# EAGLE board zegarek_v1.2 (EAGLE 6.2)
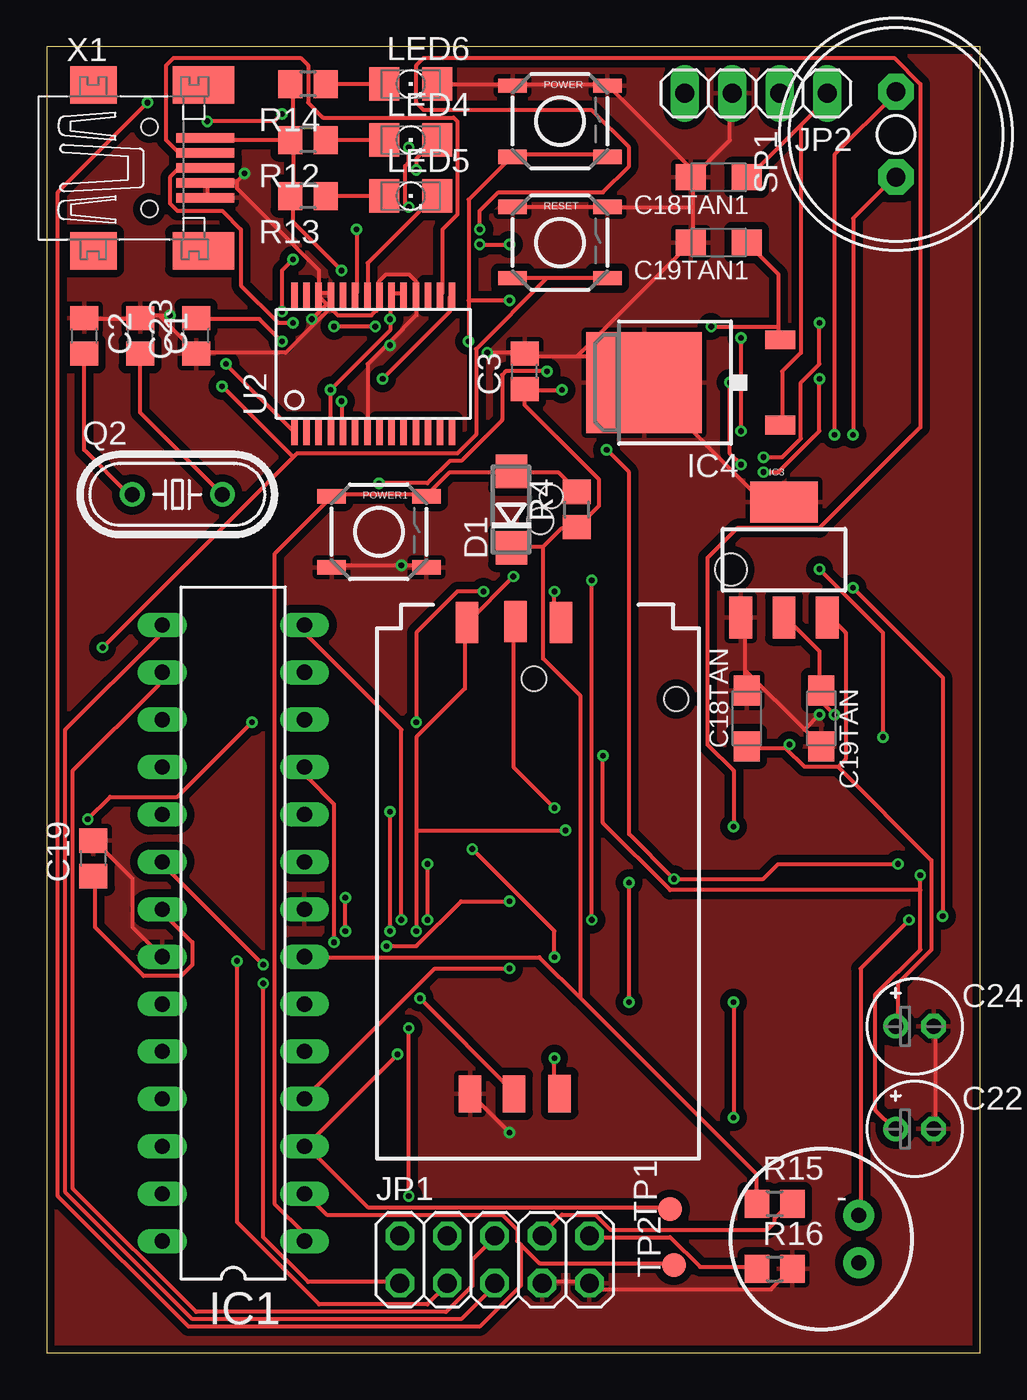
[diagram p0: board, top side]
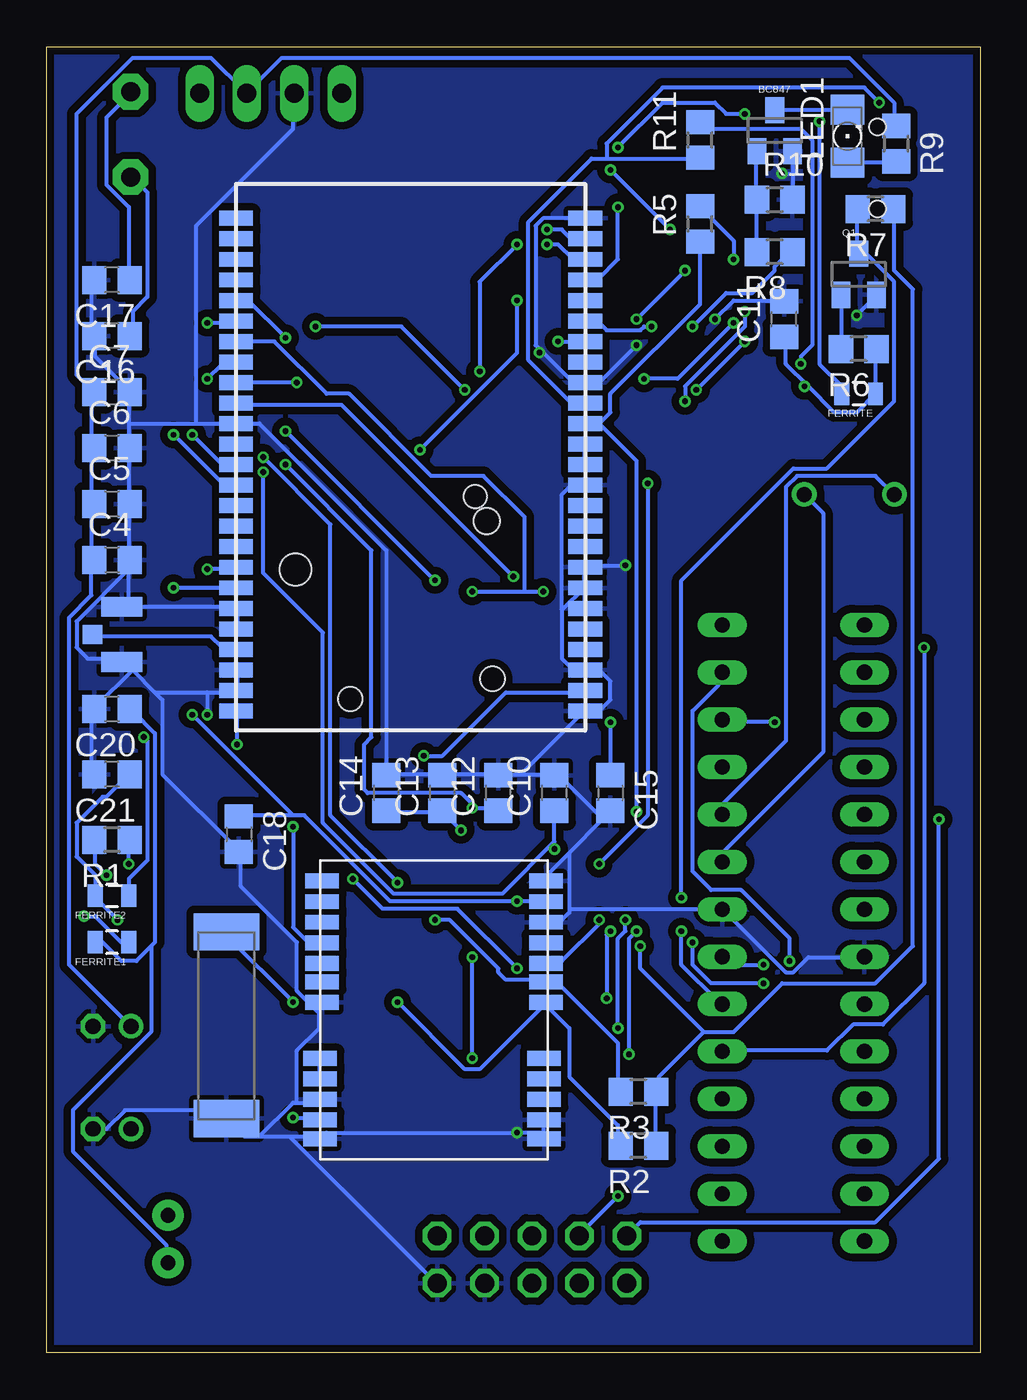
[diagram p1: board, bottom side, seen from below]

Size 50 x 70 mm. Coordinates in mm from the lower left corner, seen from the top.
Outline: 0,0 50,0 50,70 0,70 0,0
Copper layers (1*16): Top 0.035mm / dielectric 1.5mm / Bottom 0.035mm
Design rules: minimum track width 6mil, minimum drill 12mil, track to track 6mil, track to pad 6mil, pad to pad 6mil, via to via 6mil, smd to smd 0mil, copper to edge 10mil, drill to drill 10mil, minimum pad ring 10mil, minimum via ring 6mil, stop-mask expansion 2mil, vias tented up to drill 100mil, thermal gap 10mil
Net classes: 0 default: width 0.203 mm

## Footprints (pad centres in the part's own frame; a part is rotated, then mirrored left to right if it is on the bottom)
SOT23 = smd 1 x 1.4: 1 -0.95,-1.1; 2 0.95,-1.1; 3 0,1.1
C0805 = smd 1.3 x 1.5: 1 -0.95,0; 2 0.95,0
SMC_A = smd 1.6 x 1.4: + -1.5,0; - 1.5,0
E2-5 = drill 0.813 pad 1.27: + -1.016,0 | drill 0.813 pad 1.27 octagon: - 1.016,0
DO214AC = smd 1.8 x 1.7: A 2.05,0; C -2.05,0
0805 = smd 0.8 x 1.2: 1 -0.9,0; 2 0.9,0
LEON-G100/G200 = smd 1.8 x 0.8: 1 -9.35,13.6; 2 -9.35,12.5; 3 -9.35,11.4; 4 -9.35,10.3; 5 -9.35,9.2; 6 -9.35,8.1; 7 -9.35,7; 8 -9.35,5.9; 9 -9.35,4.8; 10 -9.35,3.7; 11 -9.35,2.6; 12 -9.35,1.5; 13 -9.35,0.4; 14 -9.35,-0.7; 15 -9.35,-1.8; 16 -9.35,-2.9; 17 -9.35,-4; 18 -9.35,-5.1; 19 -9.35,-6.2; 20 -9.35,-7.3; 21 -9.35,-8.4; 22 -9.35,-9.5; 23 -9.35,-10.6; 24 -9.35,-11.7; 25 -9.35,-12.8; 26 9.35,-12.8; 27 9.35,-11.7; 28 9.35,-10.6; 29 9.35,-9.5; 30 9.35,-8.4; 31 9.35,-7.3; 32 9.35,-6.2; 33 9.35,-5.1; 34 9.35,-4; 35 9.35,-2.9; 36 9.35,-1.8; 37 9.35,-0.7; 38 9.35,0.4; 39 9.35,1.5; 40 9.35,2.6; 41 9.35,3.7; 42 9.35,4.8; 43 9.35,5.9; 44 9.35,7; 45 9.35,8.1; 46 9.35,9.2; 47 9.35,10.3; 48 9.35,11.4; 49 9.35,12.5; 50 9.35,13.6 | hole 1.31: -4.39,11.88 | hole 1.29: 3.23,12.96 | hole 1.7: 6.16,6.02 | hole 1.4: -4.07,3.42 | hole 1.24: -3.47,2.12
GPS1003 = smd 3.5 x 2: FEED 0.23,4.96; GND 0.23,-5.04
DIL28-3 = drill 0.813 long: 1 -16.51,-3.81; 2 -13.97,-3.81; 3 -11.43,-3.81; 4 -8.89,-3.81; 5 -6.35,-3.81; 6 -3.81,-3.81; 7 -1.27,-3.81; 8 1.27,-3.81; 9 3.81,-3.81; 10 6.35,-3.81; 11 8.89,-3.81; 12 11.43,-3.81; 13 13.97,-3.81; 14 16.51,-3.81; 15 16.51,3.81; 16 13.97,3.81; 17 11.43,3.81; 18 8.89,3.81; 19 6.35,3.81; 20 3.81,3.81; 21 1.27,3.81; 22 -1.27,3.81; 23 -3.81,3.81; 24 -6.35,3.81; 25 -8.89,3.81; 26 -11.43,3.81; 27 -13.97,3.81; 28 -16.51,3.81
SOT223 = smd 1.219 x 2.235: 1 -2.311,-3.099; 2 0,-3.099; 3 2.311,-3.099 | smd 3.6 x 2.2: 4 0,3.099
DPACK_3 = smd 1 x 1.6: 1 -2.28,-4.8; 3 2.28,-4.8 | smd 5.4 x 6.2: 4 0,2.5
2X05 = drill 1.016 octagon: 1 -5.08,-1.27; 2 -5.08,1.27; 3 -2.54,-1.27; 4 -2.54,1.27; 5 0,-1.27; 6 0,1.27; 7 2.54,-1.27; 8 2.54,1.27; 9 5.08,-1.27; 10 5.08,1.27
1X04 = drill 1.016 long: 1 -3.81,0; 2 -1.27,0; 3 1.27,0; 4 3.81,0
1206 = smd 1.6 x 1.803: A -1.422,0; C 1.422,0
TACTILE_SWITCH_SMD = smd 1.524 x 0.762: 1 -2.54,1.905; 2 2.54,1.905; 3 -2.54,-1.905; 4 2.54,-1.905
HC49/S = drill 0.813: 1 -2.413,0; 2 2.413,0
R0805 = smd 1.3 x 1.5: 1 -0.95,0; 2 0.95,0
AL11P = drill 1.016 pad 1.905 octagon: + 2.286,0; - -2.286,0
TP13R = smd 1.3 x 1.3: TP 0,0
SSOP28DB = smd 0.348 x 1.397: 1 -4.225,-3.656; 2 -3.575,-3.656; 3 -2.925,-3.656; 4 -2.275,-3.656; 5 -1.625,-3.656; 6 -0.975,-3.656; 7 -0.325,-3.656; 8 0.325,-3.656; 9 0.975,-3.656; 10 1.625,-3.656; 11 2.275,-3.656; 12 2.925,-3.656; 13 3.575,-3.656; 14 4.225,-3.656; 15 4.225,3.656; 16 3.575,3.656; 17 2.925,3.656; 18 2.275,3.656; 19 1.625,3.656; 20 0.975,3.656; 21 0.325,3.656; 22 -0.325,3.656; 23 -0.975,3.656; 24 -1.625,3.656; 25 -2.275,3.656; 26 -2.925,3.656; 27 -3.575,3.656; 28 -4.225,3.656
SIMHOLDER3 = smd 2.2 x 1.2: 1 0.95,4.81; 2 0.91,7.41; 3 0.95,9.86 | smd 2 x 1.2: 4 26.2,9.78; 5 26.22,7.34; 6 26.22,4.98
MIC-9.7MM = drill 0.8 pad 1.676: 1 -2,1.27; 2 -2,-1.27
RF-IPX1 = smd 1 x 1.05: FEED 0,-1.05 | smd 1.05 x 2.2: GND 1.475,0.525; GND1 -1.475,0.525
NEO-6M = smd 0.8 x 1.8: CFG_GPS0/SCK -3.32,-6.15; EXTINT0 3.98,5.75; GND -4.42,5.85; GND1 -6.52,5.85; GND2 -6.52,-6.15; GND3 7.28,-6.25; MISO/CFG_COM1 -4.42,-6.15; MOSI/CFG_COM0 -5.52,-6.15; RESERVED 7.28,5.75; RESERVED1 -2.22,5.85; RESERVED2 -2.22,-6.15; RF_IN -5.52,5.85; RXD1 3.98,-6.25; SCL2 1.88,-6.25; SDA2 0.78,-6.25; SS_N 6.18,5.75; TIMEPULSE 5.08,5.75; TXD1 2.88,-6.25; USB_DM 2.88,5.75; USB_DP 1.88,5.75; V_BCKP 5.08,-6.25; VCC 6.18,-6.25; VCC_REF -3.32,5.85; VDD_USB 0.78,5.75
32005-301 = smd 3.1 x 0.5: 1 3,1.6; 2 3,0.8; 3 3,0; 4 3,-0.8; 5 3,-1.6 | smd 2.5 x 2: M1 -3,-4.45; M2 -3,4.45 | smd 3.3 x 2: M3 2.9,4.45; M4 2.9,-4.45 | hole 0.9: 0,2.2; 0,-2.2

## Placement (x,y rotation side)
BC847  [SOT23]  11,65.5 0 bottom
C1  22pF  [C0805]  5,54.5 270 top
C2  22pF  [C0805]  2,54.5 270 top
C3  100nF  [C0805]  25.6,52.6 90 top
C4  39pF  [C0805]  46.5,42.5 0 bottom
C5  10pF  [C0805]  46.5,45.5 0 bottom
C6  10nF  [C0805]  46.5,48.5 0 bottom
C7  100nF  [C0805]  46.5,51.5 0 bottom
C10  47pF  [C0805]  22.8,30 90 bottom
C11  47pF  [C0805]  10.5,55.4 90 bottom
C12  47pF  [C0805]  25.8,30 90 bottom
C13  47pF  [C0805]  28.8,30 90 bottom
C14  100nF  [C0805]  31.8,30 90 bottom
C15  47pF  [C0805]  19.8,30 270 bottom
C16  27pF  [C0805]  46.5,54.5 180 bottom
C17  27pF  [C0805]  46.5,57.5 180 bottom
C18  100nF  [C0805]  39.7,27.8 270 bottom
C18TAN  10uF  [SMC_A]  37.5,34 90 top
C18TAN1  10uF  [SMC_A]  36,63 180 top
C19  100nF  [C0805]  2.5,26.5 90 top
C19TAN  10uF  [SMC_A]  41.5,34 270 top
C19TAN1  10uF  [SMC_A]  36,59.5 180 top
C20  27pF  [C0805]  46.5,34.5 180 bottom
C21  27pF  [C0805]  46.5,31 180 bottom
C22  [E2-5]  46.5,12 0 top
C23  100nF  [C0805]  8,54.5 90 top
C24  [E2-5]  46.5,17.5 0 top
D1  GS1B  [DO214AC]  24.9,45.2 90 top
FERRITE  [0805]  6.5,51.4 180 bottom
FERRITE1  82nH  [0805]  46.5,22 180 bottom
FERRITE2  82nH  [0805]  46.5,24.5 180 bottom
G1  LEON-G100/G200  [LEON-G100/G200]  30.5,48 180 bottom
GPS1003  GPS1003  [GPS1003]  40.6,17.6 0 bottom
IC1  MEGA8-P  [DIL28-3]  10,22.5 90 top
IC3  LM1117S-3.3  [SOT223]  39.5,42.5 0 top
IC4  NCV78M05BDTRKG  [DPACK_3]  34.5,52 90 top
JP1  [2X05]  24,5 0 top
JP2  [1X04]  38,67.5 180 top
LED1  [1206]  7.1,65.2 90 bottom
LED4  [1206]  19.5,65 0 top
LED5  [1206]  19.5,62 0 top
LED6  [1206]  19.5,68 0 top
POWER  [TACTILE_SWITCH_SMD]  27.5,66 0 top
POWER1  [TACTILE_SWITCH_SMD]  17.8,44 0 top
Q1  [SOT23]  6.5,57.8 0 bottom
Q2  [HC49/S]  7,46 0 top
R1  100k  [R0805]  46.5,27.5 180 bottom
R2  4.7k  [R0805]  18.3,11.1 180 bottom
R3  4.7k  [R0805]  18.3,14 180 bottom
R4  22k  [R0805]  28.4,45.2 90 top
R5  1k  [R0805]  15,60.5 90 bottom
R6  330k  [R0805]  6.5,53.8 180 bottom
R7  22k  [R0805]  5.6,61.3 180 bottom
R8  10k  [R0805]  11,59 180 bottom
R9  820  [R0805]  4.5,64.8 270 bottom
R10  47k  [R0805]  11,61.8 0 bottom
R11  1k  [R0805]  15,65 90 bottom
R12  330  [R0805]  14,65 180 top
R13  330  [R0805]  14,62 180 top
R14  330  [R0805]  14,68 180 top
R15  1k5  [R0805]  39,8 0 top
R16  2k  [R0805]  39,4.5 0 top
RESET  [TACTILE_SWITCH_SMD]  27.5,59.5 0 top
SP1  AL11P  [AL11P]  45.5,65.3 90 top
TP1  TPTP13R  [TP13R]  33.4,7.7 90 top
TP2  TPTP13R  [TP13R]  33.6,4.7 90 top
U2  [SSOP28DB]  17.5,53 0 top
U$5  SIMHOLDER3  [SIMHOLDER3]  17.7,40.1 270 top
U$6  MIC9.7MM  [MIC-9.7MM]  41.5,6.1 180 top
U$7  RFIPX1  [RF-IPX1]  46.5,38.5 270 bottom
U$9  NEO-6M  [NEO-6M]  29.5,18 90 bottom
X1  MINI-USB-32005-301  [32005-301]  5.5,63.5 0 top

## Library data of the parts
BC847 FERRITE FERRITE1 FERRITE2 IC3 POWER POWER1 Q1 RESET U$5 U$6 = SparkFun
C1-C7 C10-C18 C18TAN C18TAN1 C19 C19TAN C19TAN1 C20-C24 R1-R16 = rcl
D1 = diode
G1 = u-blox-1; OC_FARNELL: unknown; OC_NEWARK: unknown
GPS1003 U$9 = u-blox_NEO-6M
IC1 = atmel; OC_FARNELL: unknown; OC_NEWARK: unknown
IC4 = linear
JP1 JP2 = pinhead
LED1 LED4-LED6 = led
Q2 = crystal; OC_FARNELL: 1667008; OC_NEWARK: unknown
SP1 = buzzer; OC_FARNELL: unknown; OC_NEWARK: unknown
TP1 TP2 = testpad
U2 = ftdichip-5
U$7 = RFIPX
X1 = con-cypressindustries; OC_FARNELL: unknown; OC_NEWARK: unknown

## Nets
+3V0: C18.1 C19TAN.+ IC3.2 R2.1 R3.1 R7.1 U$9.VCC
+5V0: C3.1 C19TAN1.+ D1.C IC1.7 IC1.20 IC4.3 R4.1 R15.1
EXTINT0: G1.24 U$9.EXTINT0
GND: BC847.2 C1.1 C2.1 C3.2 C4.2 C5.2 C6.2 C7.2 C10.2 C11.2 C12.2 C13.2 C14.2 C15.2 C16.2 C17.2 C18.2 C18TAN1.- C18TAN.- C19.2 C19TAN1.- C19TAN.- C20.2 C21.2 C22.- C23.1 C24.- G1.1 G1.3 G1.6 G1.7 G1.8 G1.12 G1.17 G1.25 G1.36 G1.45 G1.46 G1.48 G1.49 GPS1003.GND IC1.8 IC1.22 IC3.1 IC3.4 IC4.4 JP1.7 JP1.9 JP2.3 LED6.C POWER1.3 POWER1.4 POWER.1 POWER.2 Q1.2 R10.2 R16.2 RESET.1 RESET.2 U2.7 U2.18 U2.21 U2.25 U2.26 U$5.6 U$7.GND U$7.GND1 U$9.GND U$9.GND1 U$9.GND2 U$9.GND3 U$9.MOSI/CFG_COM0 U$9.V_BCKP U$9.VDD_USB X1.4 X1.5
LCD1: IC1.11 JP1.1
LCD2: IC1.12 JP1.2
LCD3: IC1.13 JP1.3
LCD4: IC1.14 JP1.4
LCD5: IC1.15 JP1.5
LCD6: IC1.16 JP1.6
LEON_POWER: G1.19 IC1.4 POWER.3 POWER.4 R1.1
LEON_RESET: C11.1 FERRITE.1 IC1.5 R6.1 RESET.3 RESET.4
LEON_RESET?: IC1.6 Q1.3 R7.2
LEON_RXD: G1.16 IC1.2 R11.1 TP2.TP
LEON_TXD: G1.15 IC1.3 R5.1 TP1.TP
N$1: FERRITE.2 G1.22
N$2: C2.2 IC1.10 Q2.1
N$3: C22.+ G1.2 R1.2
N$4: C13.1 C14.1 G1.35 U$5.1 U$5.5
N$5: C15.1 G1.32 U$5.3
N$6: C12.1 G1.34 U$5.2
N$7: C16.1 G1.39 SP1.-
N$8: C10.1 G1.33 U$5.4
N$9: C17.1 G1.38 SP1.+
N$10: G1.13 G1.14
N$11: FERRITE1.1 G1.44
N$12: FERRITE2.1 G1.43
N$13: C20.1 FERRITE1.2 U$6.1
N$14: C21.1 FERRITE2.2 U$6.2
N$15: Q1.1 R6.2
N$16: BC847.1 R8.2 R10.1
N$17: LED1.A R9.2
N$18: BC847.3 LED1.C
N$19: G1.20 R8.1
N$20: G1.47 U$7.FEED
N$23: GPS1003.FEED U$9.RF_IN
N$24: G1.31 R2.2 U$9.SDA2
N$25: U$9.RESERVED1 U$9.VCC_REF
N$26: G1.30 R3.2 U$9.SCL2
N$27: G1.23 U$9.TXD1
N$28: C1.2 IC1.9 Q2.2
N$29: D1.A IC1.1 POWER1.1 POWER1.2 R4.2
N$30: C19.1 IC1.21
N$31: LED4.A R12.1
N$32: LED5.A R13.1
N$33: LED4.C U2.23
N$34: LED5.C U2.22
N$35: R11.2 U2.1
N$36: R5.2 U2.5
N$37: JP1.10 R16.1
N$38: JP1.8 R15.2
N$40: JP2.4
N$47: C23.2 R12.2 R13.2 R14.2 U2.4 U2.19 U2.20 X1.1
N$48: U2.16 X1.2
N$49: U2.15 X1.3
N$51: LED6.A R14.1
VBAT: C4.1 C5.1 C6.1 C7.1 C18TAN.+ C24.+ G1.50 IC3.3 JP2.2 R9.1
VIN: C18TAN1.+ IC4.1 JP2.1

## Tracks (layer width: path | path; a pad name or v marks a point on that pad's centre or on a via)
+3V0  (via drill 0.3)
  Top 0.203: IC3.2 39.6,39.4 41.4,37.6 41.4,35.6 C19TAN.+ 41.6,35.4 41.6,34.8 v42.2,34.2 | v24.8,24.2 22.2,24.2 19.8,21.8 v18.2,21.8
  Bottom 0.203: 36.8,28.8 36.2,28.8 31.6,24.2 v24.8,24.2 23.4,24.2 U$9.VCC | 36.8,28.8 39.6,28.8 C18.1 | 36.8,28.8 v42.2,34.2 | R2.1 17.4,11.2 17.4,14 R3.1 17.2,14 17.2,14.8 14.8,17.2 | 14.8,17.2 13.2,17.2 10.6,19.8 5.6,19.8 3.6,21.8 3.6,57 4.6,58 4.6,61.2 R7.1 | v18.2,21.8 18.2,20.6 14.8,17.2
+5V0  (via drill 0.3)
  Top 0.203: 39.2,55 39.2,57.8 C19TAN1.+ | 39.2,55 39.2,54.4 IC4.3 | 28.4,44.2 27.6,44.2 26.6,43.2 | 26.6,43.2 25,43.2 D1.C | 25.6,51.6 25.6,50.8 29.6,46.8 29.6,45.4 28.4,44.2 | 28.4,44.2 R4.1 | v35.6,55 39.2,55 | 25.6,51.6 v27.6,51.6 | 25.6,51.6 C3.1 | 28.6,19 26.4,21.2 14,21.2 IC1.7 | 28.6,19 38,9.6 38,8 R15.1 | v11.6,20.8 6.2,26.2 IC1.20 | 26.6,43.2 26.6,37.2 28.6,35.2 28.6,19
  Bottom 0.203: v35.6,55 31,55 v27.6,51.6 | v11.6,20.8 13.4,20.8 13.8,21.2 IC1.7
EXTINT0  (via drill 0.3)
  Top 0.203: v36.8,28.2 36.8,31.2 35.4,32.6 35.4,42.6 37,44.2 41.4,44.2 46.8,49.6 46.8,68 45.4,69.4 20.2,69.4 19.8,69 19.8,67 20.2,66.6 29.2,66.6 31.2,64.6 31.2,63.6 29.8,62.2 24.2,62.2 23.2,61.2 v23.2,60.2
  Bottom 0.203: v36.8,28.2 36.8,22.8 36,22 35.4,22 U$9.EXTINT0 | v23.2,60.2 22.4,60.2 22,59.8 21.2,59.8 G1.24
GND  (via drill 0.3)
  Top 0.203: 18.4,54.2 19.8,55.6 19.8,56.6 U2.18 19.8,56.8 19.8,57.4 19.4,57.8 18.2,57.8 17.8,57.4 17.8,56.8 U2.21 17.8,56.6 17.8,56 17.4,55.6 15.6,55.6 15.2,56 | 18.4,54.2 17.2,53 17.2,49.4 U2.7 | 6,55.6 5,55.6 C1.1 5,55.4 2,55.4 C2.1 | 6,55.6 v6.6,55.6 | 6,55.6 8,53.6 | 10.2,62.8 v10.6,63.2 | 10.2,62.8 8.6,62.8 X1.4 8.6,62.6 8.6,62 X1.5 | 14.6,56.8 15.2,56.8 U2.25 15.2,56 | 15,56.2 14.6,56.6 U2.26 14.6,56.8 | 15,56.2 15.2,56 | 15,56.2 v14.2,55.4 | 10.2,62.8 10.2,62.4 14.6,58 14.6,56.8 | 8,53.6 12.8,53.6 15.2,56 | 8,53.6 C23.1 | LED6.C 24.8,68 POWER.1 25,68 30,68 POWER.2 30.2,67.8 34.8,63.2 | 34.6,63 34.6,61.4 | 34.6,61.4 34.6,59.6 C19TAN1.- 28.4,53.4 | RESET.1 25,61.4 30,61.4 RESET.2 30.2,61.4 34.6,61.4 | 34.6,63 34.8,63.2 | 34.8,63.2 36.6,65 36.6,67.4 JP2.3 | 34.6,63 C18TAN1.- 34.8,63.2 | 28.4,53.4 30.6,53.4 IC4.4 38.4,45.6 39.4,45.6 IC3.4 | 28.4,53.4 25.6,53.4 C3.2 25.6,53.6 v23.6,53.6 | v18.4,54 18.4,54.2 | POWER1.3 15.4,42.2 v19,42.2 20.2,42.2 POWER1.4 | C19.2 2.6,27.4 4.6,25.4 4.6,22.8 6,21.4 IC1.22 6.2,21.2 | 13.8,23.8 IC1.8 | 37.4,36.6 37.4,39.2 IC3.1 | 37.4,36.6 37.4,35.6 C18TAN.- | 37.4,36.6 40.6,33.4 | 40.6,33.4 C19TAN.- | v41.4,34.2 40.6,33.4 | R16.2 39.8,4.4 38.8,3.4 29.4,3.4 29.2,3.6 JP1.9 29,3.8 26.6,3.8 JP1.7 | C22.- 47.6,12 47.6,17.4 C24.- | v24.8,11.8 22.8,13.8 U$5.6
  Bottom 0.203: v6.6,55.6 5.6,56.6 Q1.2 | 10,63.2 10,61.8 R10.2 | 10,63.2 10,64.4 BC847.2 | v10.6,63.2 10,63.2 | v14.2,55.4 13.2,56.4 10.6,56.4 C11.2 | 23.4,53.6 23.8,54 23.8,60.4 23.4,60.8 21.2,60.8 G1.25 | 23.4,53.6 21.8,52 21.2,52 G1.17 20.4,52 v18.4,54 | v23.6,53.6 23.4,53.6 | 21.2,42.2 G1.8 | 22.4,39.8 22.4,37.2 21.8,36.6 21.2,36.6 G1.3 20.4,36.6 19.8,36 19.8,35 20.4,34.4 G1.1 21.2,34.4 24.6,31 | 21.2,41 22.4,39.8 | 21.2,41 21.2,40 G1.6 | 21.2,41 21.2,42 G1.8 | 21.2,41 G1.7 | 22.4,39.8 22.4,46 22,46.4 21.2,46.4 G1.12 | v19,42.2 21,42.2 G1.8 | 25.8,31 24.6,31 | 24.6,31 22.8,31 C10.2 22.8,30.8 22.4,30.8 20.2,28.6 | 25.8,31 28.8,31 | 25.8,31 C12.2 | 28.8,31 31.8,31 | 28.8,31 C13.2 | 22,26.8 23.4,25.4 U$9.GND3 | 22,26.8 20.2,28.6 | 20.2,28.6 19.8,29 C15.2 20.2,28.6 | 22,26.8 22,23.8 | 22,23.8 22,23.6 22.4,23.2 23.2,23.2 U$9.V_BCKP | 22,23.8 14,23.8 IC1.8 13.8,23.8 10.4,20.4 10,20.4 9.2,21.2 6.2,21.2 IC1.22 | C21.2 47.6,31 47.6,34.4 C20.2 47.4,34.6 45.4,36.6 | G1.48 39.8,36.6 39.8,35.6 G1.49 40,35.4 41.4,35.4 | 45.4,36.6 45.8,37 U$7.GND | 45.4,36.6 44.2,35.4 | 44.2,35.4 43.8,35 43.8,31 39.8,27 C18.2 39.6,26.8 39.6,25 36.6,22 36.6,19.4 35.4,18.2 | 44.2,35.4 41.4,35.4 | 45.4,36.6 U$7.GND | 41.4,35.4 v41.4,34.2 | C4.2 45.6,42.6 45.6,45.4 C5.2 45.6,45.6 45.6,48.4 C6.2 45.6,48.6 45.6,49.8 | G1.46 39.8,38.8 39.8,39.8 G1.45 | 39.8,40 G1.45 | 45.6,40 45.8,40 U$7.GND1 45.6,40 | 45.6,40 40,40 G1.45 | 45.6,40 45.6,42 | 45.6,42 45.6,42.4 C4.2 | C17.2 47.6,57.4 47.6,54.6 C16.2 47.4,54.4 47.4,53.4 45.6,51.6 C7.2 45.6,51.4 45.6,49.8 | 45.6,49.8 42,49.8 | 42,49.8 G1.36 38.6,49.8 31.8,43 31.8,31 | 45.6,42 48.4,39.2 48.4,37.8 47.8,37.2 46,37.2 U$7.GND
  Bottom 0.203: 45.6,42 C4.2 | 23.4,11.8 23.4,12.4 U$9.MOSI/CFG_COM0 | 23.4,11.8 23.4,11.6 U$9.GND2 23.4,11.8 | 23.4,11.8 v24.8,11.8 35,11.8 35.2,11.6 U$9.GND1 35.4,11.6 37,11.6 | 38.6,11.6 39.4,11.6 40.2,12.4 GPS1003.GND 40.4,12.6 40.8,13 45.8,13 46.8,12 C22.- | 38.6,11.6 37,11.6 | 36.6,13.4 36.8,13.4 38.6,11.6 | 36.6,13.4 35.4,13.4 U$9.GND | 35.4,18.2 35.4,17.4 36.6,16.2 36.6,13.4 | 35.4,18.2 35.4,18.6 U$9.VDD_USB | 37,11.6 29.2,3.8 JP1.9 | 31.8,31 C14.2 | 42,49.8 42,60.4 36.8,65.6 36.8,67.4 JP2.3
  pour Top (isolate 0.406): 0,70 50,70 50,0 0,0
  pour Bottom (isolate 0.406): 0,70 50,70 50,0 0,0
LCD1  (via drill 0.3)
  Top 0.203: v15.4,22 15.4,29.4 14,30.8 14,31.2 IC1.11 | v11.6,19.8 11.6,6.2 14,3.8 18.8,3.8 JP1.1
  Bottom 0.203: v15.4,22 15.4,20.8 14.4,19.8 v11.6,19.8
LCD2  (via drill 0.3)
  Top 0.203: v11,33.8 7,29.8 3.4,29.8 v2.2,28.6
  Bottom 0.203: v11,33.8 13.8,33.8 IC1.12 | v2.2,28.6 2.2,10.4 5.6,7 18.2,7 18.8,6.4 JP1.2
LCD3  (via drill 0.3)
  Top 0.203: v10.2,21 10.2,7 14.6,2.6 20.4,2.6 21.4,3.6 JP1.3
  Bottom 0.203: v10.2,21 10.2,22.2 12.8,24.8 14.4,24.8 15.4,25.8 15.4,34.4 14,35.8 14,36.4 IC1.13
LCD4  (via drill 0.3)
  Top 0.203: v19,23.2 19,33.4 14,38.4 14,39 IC1.14 | v19.4,8.4 v19.4,17.4
  Bottom 0.203: v19,23.2 19,22.6 19.4,22.2 v19.4,17.4 | v19.4,8.4 21.4,6.4 JP1.4
LCD5
  Top 0.203: IC1.15 6,39 6,38.4 1,33.4 1,8.6 7.8,1.8 22.2,1.8 24,3.6 JP1.5
LCD6
  Top 0.203: IC1.16 6,36.4 6,35.8 1.4,31.2 1.4,8.8 8,2.2 21.4,2.2 22.8,3.6 22.8,5 24,6.2 JP1.6
LEON_POWER  (via drill 0.3)
  Top 0.203: POWER.4 30,64.2 25,64.2 POWER.3 24.8,64 22.6,61.8 22.6,56.4 | 22.6,56.4 v22.6,54.2 | v45.6,26.2 39.2,26.2 38.4,25.4 v33.6,25.4 31.2,27.8 31.2,47.2 v30,48.4 | v24.8,20.6 20.8,20.6 IC1.4 | v24.8,56.4 22.6,56.4
  Bottom 0.203: v22.6,54.2 G1.19 | v45.6,26.2 45.6,27.4 R1.1 | v33.6,25.4 32,23.8 28,23.8 v24.8,20.6 | v24.8,56.4 24.8,53.6 v30,48.4
LEON_RESET  (via drill 0.3)
  Top 0.203: 26.8,57.6 30,57.6 RESET.4 | 26.8,57.6 25,57.6 RESET.3 | 13.2,48 13.4,48.2 22,48.2 23,49.2 23,53.8 26.8,57.6 | 13.2,48 v3,37.8 | 13.2,48 v9.4,51.8
  Bottom 0.203: R6.1 5.6,53.8 FERRITE.1 6.6,50.4 7.8,50.4 9.2,51.8 | 9.2,51.8 10.4,53 10.4,54.4 C11.1 | v3,37.8 3,19.8 5.2,17.6 6.8,17.6 8.2,16.2 13.8,16.2 IC1.5 | v9.4,51.8 9.2,51.8
LEON_RESET?  (via drill 0.3)
  Top 0.203: v16,22.6 v16,24.4
  Bottom 0.203: R7.2 6.6,61.2 6.6,59 Q1.3 6.4,58.8 6,58.8 4.6,57.4 4.6,51 8.2,47.4 10,47.4 16,41.4 v16,24.4 | v16,22.6 16,20.8 14,18.8 IC1.6
LEON_RXD  (via drill 0.3)
  Top 0.203: 25.4,5.8 25.2,6 25.2,6.6 24.4,7.4 15,7.4 14,8.4 IC1.2 | 25.4,5.8 26.4,4.8 33.6,4.8 TP2.TP | v5.4,67 0.6,62.2 0.6,8.4 7.6,1.4 23.2,1.4 25.4,3.6 25.4,5.8
  Bottom 0.203: 20,64 20.8,64 24.2,60.6 24.2,53.2 22,51 21.2,51 G1.16 | 20,64 15,64 R11.1 | 20,64 20,64.8 17,67.8 6.2,67.8 v5.4,67
LEON_TXD  (via drill 0.3)
  Top 0.203: TP1.TP 33.4,7.8 17.2,7.8 14,11 IC1.3 14,11.2 v18.8,16 | v18.4,22.6 v18.4,29
  Bottom 0.203: R5.1 15,56.2 19.8,51.4 19.8,50.4 20.4,49.8 | 20.4,49.8 G1.15 21,49.8 | 20.4,49.8 18.4,47.8 v18.4,29 | v18.4,22.6 18.8,22.2 v18.8,16
N$1  (via drill 0.3)
  Top 0.203: v8.6,66 12.2,66 v12.6,66.4 | v19.4,64.6 19.4,63.8 19.2,63.6 19.2,61.6 v19.4,61.4
  Bottom 0.203: FERRITE.2 7.4,51.8 8.6,53 v8.6,66 | v12.6,66.4 13.6,66.4 14.2,67 17,67 v19.4,64.6 | v19.4,61.4 19.4,58.6 20.4,57.6 21,57.6 G1.22
N$2
  Top 0.203: C2.2 2,48.4 4.4,46 Q2.1
  Bottom 0.203: IC1.10 13.8,29 13.8,29.4 10.4,32.8 10.4,46.4 9.8,47 5.6,47 Q2.1
N$3  (via drill 0.3)
  Top 0.203: 46.8,24.8 46.8,21.6 44.4,19.2 44.4,13 45.4,12 C22.+ | 46.8,24.8 v46.8,25.6 | v29.8,32 29.8,28.4 33.4,24.8 46.8,24.8
  Bottom 0.203: v46.8,25.6 47.4,26.2 47.4,27.4 R1.2 | v29.8,32 28.8,32 25.4,35.4 21.2,35.4 G1.2
N$4  (via drill 0.3)
  Top 0.203: v25,41.6 22.6,39.2 U$5.1 22.4,39 22.4,35.6 19.8,33 19.8,28 | v20,19 25,14 U$5.5 | 19.8,28 v19.8,22.6 | 19.8,28 v27.8,28
  Bottom 0.203: 28.8,29 31.8,29 C14.1 | v25,41.6 34.2,50.8 39.8,50.8 G1.35 | v20,19 20,22.4 v19.8,22.6 | v27.8,28 28.8,29 | 28.8,29 C13.1
N$5  (via drill 0.3)
  Top 0.203: v19.8,33.8 19.8,38.6 22,40.8 v23.4,40.8 | v27.2,40.8 27.2,39.4 27.4,39.2 U$5.3
  Bottom 0.203: v19.8,33.8 C15.1 | v27.2,40.8 24.4,40.8 | 24.4,40.8 v23.4,40.8 | G1.32 37.8,54.2 35,51.4 33.8,51.4 29.4,47 26.6,47 24.4,44.8 24.4,40.8
N$6  (via drill 0.3)
  Top 0.203: v27.2,29.2 25,31.4 25,39 U$5.2 | v36.6,52 36.6,48.2 v37.2,47.6
  Bottom 0.203: 27,29.2 25.8,29.2 C12.1 | v36.6,52 G1.34 | v37.2,47.6 32.6,43 32.6,33 33,32.6 33,30.2 32.8,30 27.8,30 27,29.2 | 27,29.2 v27.2,29.2
N$7  (via drill 0.3)
  Top 0.203: v43.2,49.2 43.2,60.8 45.4,63 SP1.-
  Bottom 0.203: C16.1 45.4,54.6 45.4,55.8 44.6,56.6 44.6,62.2 45.4,63 SP1.- | v43.2,49.2 40.6,46.6 40,46.6 G1.39
N$8  (via drill 0.3)
  Top 0.203: v22.8,27 27.2,22.6 v27.2,21.2 | v27.2,15.8 27.2,14.2 27.4,14 U$5.4 | v41.4,52.2 41.4,49.4 39.2,47.2 v38.4,47.2
  Bottom 0.203: v22.8,27 22.8,27.4 | 22.8,27.4 C10.1 | v27.2,15.8 v27.2,21.2 | v41.4,52.2 40.6,53 40,53 G1.33 | v38.4,47.2 38.4,41.8 35.2,38.6 35.2,28.4 31.4,24.6 25.6,24.6 22.8,27.4
N$9  (via drill 0.3)
  Top 0.203: v42.2,49.2 42.2,64.2 45.4,67.4 SP1.+
  Bottom 0.203: C17.1 45.6,57.6 45.6,61.4 46.8,62.6 46.8,66.2 45.6,67.4 SP1.+ | G1.38 40.6,47.6 v42.2,49.2
N$10
  Bottom 0.203: G1.13 21.2,47.6 21.2,48.6 G1.14
N$11  (via drill 0.3)
  Top 0.203: v48,23.4 48,36.2 v43.2,41
  Bottom 0.203: FERRITE1.1 46,22 47.4,23.4 v48,23.4 | G1.44 v43.2,41
N$12  (via drill 0.3)
  Top 0.203: v44.8,33 44.8,38.6 v41.4,42
  Bottom 0.203: FERRITE2.1 45.6,25.4 44.6,26.4 44.6,32.8 v44.8,33 | v41.4,42 40,42 G1.43
N$13
  Bottom 0.203: FERRITE1.2 47,22 46,21 45.2,21 44.4,21.8 | 44.4,21.8 44.2,22 44.2,33.2 45.4,34.4 C20.1 | 44.4,21.8 44.4,17.2 48.6,13 48.6,10.8 43.6,5.8 43.6,5 U$6.1
N$14  (via drill 0.3)
  Top 0.203: v46.2,23.2 43.6,20.6 43.6,7.4 U$6.2
  Bottom 0.203: C21.1 45.6,31 46.8,29.8 47,29.8 48.4,28.4 48.4,26.6 47.4,25.6 FERRITE2.2 47.4,24.4 v46.2,23.2
N$15
  Bottom 0.203: Q1.1 7.4,56.6 7.4,53.8 R6.2
N$16
  Bottom 0.203: 12,61.8 12,64.4 BC847.1 | 12,61.8 12,59 R8.2 | 12,61.8 R10.1
N$17
  Bottom 0.203: R9.2 4.6,63.8 7,63.8 LED1.A
N$18
  Bottom 0.203: BC847.3 7.2,66.6 LED1.C
N$19  (via drill 0.3)
  Top 0.203: v17.6,55 v15.4,55
  Bottom 0.203: v15.4,55 13.6,56.8 12.2,56.8 11,58 11,58.2 10.2,59 R8.1 | v17.6,55 18,55 18.2,54.8 20,54.8 20.4,55.2 21,55.2 G1.20
N$20
  Bottom 0.203: U$7.FEED 47.4,38.4 41.2,38.4 40.6,37.8 40,37.8 G1.47
N$23  (via drill 0.3)
  Top 0.203: v36.8,18.8 v36.8,12.6
  Bottom 0.203: v36.8,12.6 35.4,12.6 U$9.RF_IN | v36.8,18.8 40.4,22.4 GPS1003.FEED
N$24  (via drill 0.3)
  Top 0.203: v41.4,55.2 41.4,53 40.4,52 40.4,49 39.4,48 v38.4,48 | v31.2,18.8 v31.2,25.2
  Bottom 0.203: R2.2 19.4,11.2 19.4,12.2 22,14.8 22,17.4 23.2,18.6 U$9.SDA2 23.4,18.6 26.8,15.2 27.6,15.2 v31.2,18.8 | v41.4,55.2 40,55.2 G1.31 | v38.4,48 34.8,44.4 34.8,28.8 v31.2,25.2
N$25
  Bottom 0.203: U$9.VCC_REF 35.4,14.8 35.4,15.6 U$9.RESERVED1
N$26  (via drill 0.3)
  Top 0.203: v37.2,49.4 v37.2,54.4 | v29.2,23.2 v29.2,41.4
  Bottom 0.203: R3.2 19.4,14 19.4,16.6 22.6,19.8 23.2,19.8 U$9.SCL2 23.4,20 25.4,20 25.8,20.4 25.8,20.6 28.4,23.2 v29.2,23.2 | G1.30 39.2,56.4 v37.2,54.4 | v29.2,41.4 v37.2,49.4
N$27  (via drill 0.3)
  Top 0.203: v20.4,26.2 v20.4,23.2 | v17.8,46.6 20.4,46.6 21.6,47.8 22.2,47.8 24.4,50 24.4,52.4 24.6,52.6 v26.8,52.6 | v23.2,59.4 v24.8,59.4
  Bottom 0.203: v20.4,23.2 20.4,23 22.4,21 23.2,21 U$9.TXD1 | v20.4,26.2 17.8,28.8 v17.8,46.6 | v26.8,52.6 26.8,57.4 v24.8,59.4 | v23.2,59.4 22.6,59.4 21.8,58.6 G1.23
N$28
  Top 0.203: C1.2 5,50.4 Q2.2
  Bottom 0.203: IC1.9 13.8,26.4 13.8,26.8 8.4,32.2 8.4,45 Q2.2
N$29
  Top 0.203: R4.2 28.4,46.2 27.4,47.2 25,47.2 D1.A 24.8,47.2 21.6,47.2 20.4,46 POWER1.2 20.2,46 15.4,46 POWER1.1 15.2,45.8 12.2,42.8 12.2,8 13.8,6.4 IC1.1
N$30
  Top 0.203: C19.1 2.6,25.4 2.6,22.8 5.2,20.2 7.2,20.2 7.8,20.8 7.8,22 6.2,23.6 IC1.21
N$31
  Top 0.203: LED4.A R12.1
N$32
  Top 0.203: LED5.A R13.1
N$33  (via drill 0.3)
  Top 0.203: v16.6,60.2 16.6,56.8 U2.23 | v19.8,63.4 19.8,64 20.8,65 LED4.C
  Bottom 0.203: v19.8,63.4 v16.6,60.2
N$34
  Top 0.203: U2.22 17.2,56.8 17.2,58.4 20.8,62 LED5.C
N$35  (via drill 0.3)
  Top 0.203: v9.6,53 13.2,49.4 U2.1
  Bottom 0.203: v9.6,53 9.6,53.4 9,54 9,65 9.6,65.6 14.8,65.6 15,65.8 R11.2
N$36  (via drill 0.3)
  Top 0.203: v15.8,51 15.8,49.4 U2.5 | v12.6,55.8 12.6,58 v13.2,58.6
  Bottom 0.203: v15.8,51 15.8,51.8 12.6,55 v12.6,55.8 | v13.2,58.6 13.2,59.6 15,61.4 R5.2
N$37
  Top 0.203: R16.1 38,4.6 35,4.6 33.4,6.2 29.2,6.2 JP1.10
N$38
  Top 0.203: R15.2 39.8,8 39,7.2 39,7 38.6,6.6 30.2,6.6 29.4,7.4 27.6,7.4 26.6,6.4 JP1.8
N$47  (via drill 0.3)
  Top 0.203: 13.2,65 13.2,62 | 13.2,65 13.2,68 R14.2 | 13.2,65 R12.2 8.6,65 X1.1 | U2.4 15.2,49.4 v15.2,51.6 18.4,54.8 v18.4,55.4 18.4,56.6 U2.20 18.6,56.8 19,56.8 U2.19 | v12.6,54.2 11.4,55.4 8,55.4 C23.2 | 13.2,62 13.2,60.6 v15.8,58 | 13.2,62 R13.2
  Bottom 0.203: v15.2,51.6 v12.6,54.2 | v18.4,55.4 v15.8,58
N$48
  Top 0.203: U2.16 21.2,56.8 21.2,60.2 22,61 22,66 21.8,66.2 14.8,66.2 14,67 14,69 13.6,69.4 6.8,69.4 6.4,69 6.4,65 7,64.4 8.4,64.4 X1.2
N$49  (via drill 0.3)
  Top 0.203: v18,52.2 21.6,55.8 21.6,56.6 U2.15 | v13.2,55.2 12.4,55.2 10.4,57.2 10.4,60.2 9.4,61.2 7,61.2 6.6,61.6 6.6,63 7,63.4 8.4,63.4 X1.3
  Bottom 0.203: v18,52.2 16.2,52.2 v13.2,55.2
N$51
  Top 0.203: LED6.A R14.1
VBAT  (via drill 0.3)
  Top 0.203: 39.6,32.4 37.6,32.4 C18TAN.+ | 39.6,32.4 40.6,31.4 42.4,31.4 | 42.4,31.4 42.8,31.8 42.8,38.6 42,39.4 IC3.3 | 39.6,32.4 v39.8,32.6 | 42.4,31.4 47.4,26.4 47.4,21.6 45.6,19.8 45.6,17.6 C24.+
  Bottom 0.203: R9.1 4.6,65.8 4.6,67 7,69.4 37.4,69.4 39.2,67.6 JP2.2 39.4,67.6 41.2,69.4 45.4,69.4 48.4,66.4 48.4,52.4 47.6,51.6 C7.1 47.6,51.4 47.6,48.6 C6.1 47.6,48.4 47.6,45.6 C5.1 47.6,45.4 47.6,42.6 C4.1 47.6,42.4 47.6,40.6 48.8,39.4 48.8,20.8 45.6,17.6 C24.+ | v39.8,32.6 39.8,34.4 G1.50
VIN
  Top 0.203: 40.4,65.8 42,67.4 JP2.1 | 40.4,65.8 37.6,63 C18TAN1.+ | 40.4,65.8 40.4,53.6 39.4,52.6 39.4,49.8 IC4.1